# Altium PCB wifi.PcbDoc (part 1 of 2)
Units mm, origin at the board's own origin, x right, y up, seen from the top; angles counter-clockwise.
Board outline 104 x 32.68 mm, 4 copper layers (Top Layer, Int1 (GND), Int2 (PWR), GND), stack 1.369 mm thick; 67 components, 46 nets, 270 pads, 283 vias.
Unrouted connection lines stored in the file: 6.
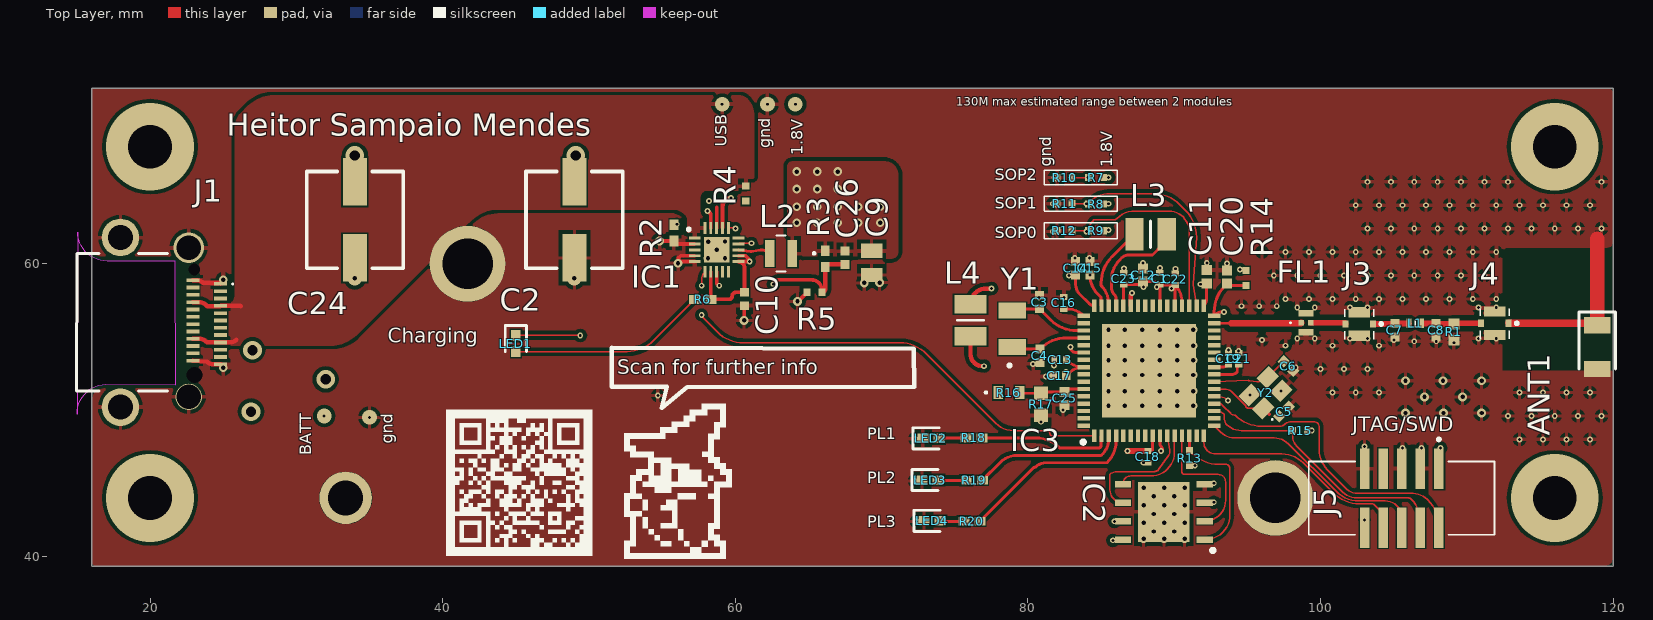
[diagram p0: Top Layer view]
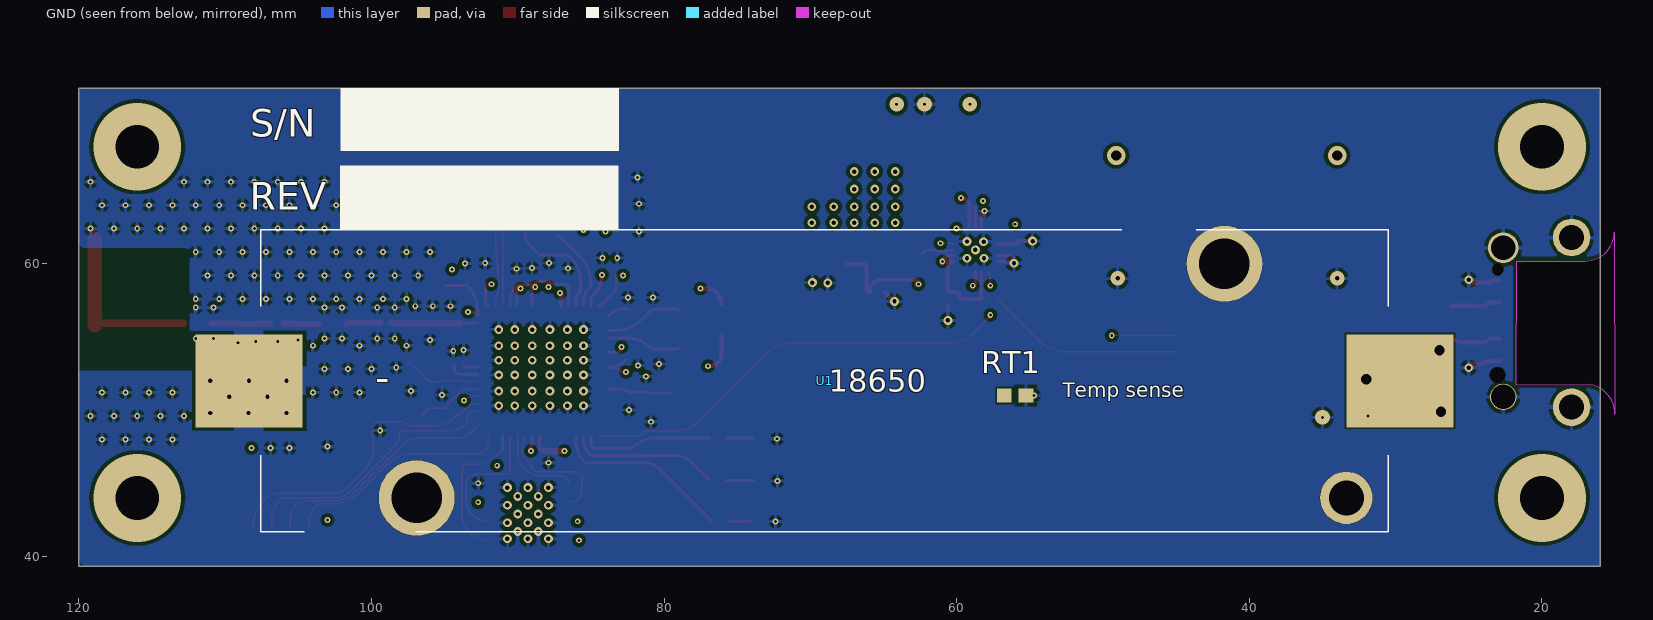
[diagram p1: GND view, seen from below]
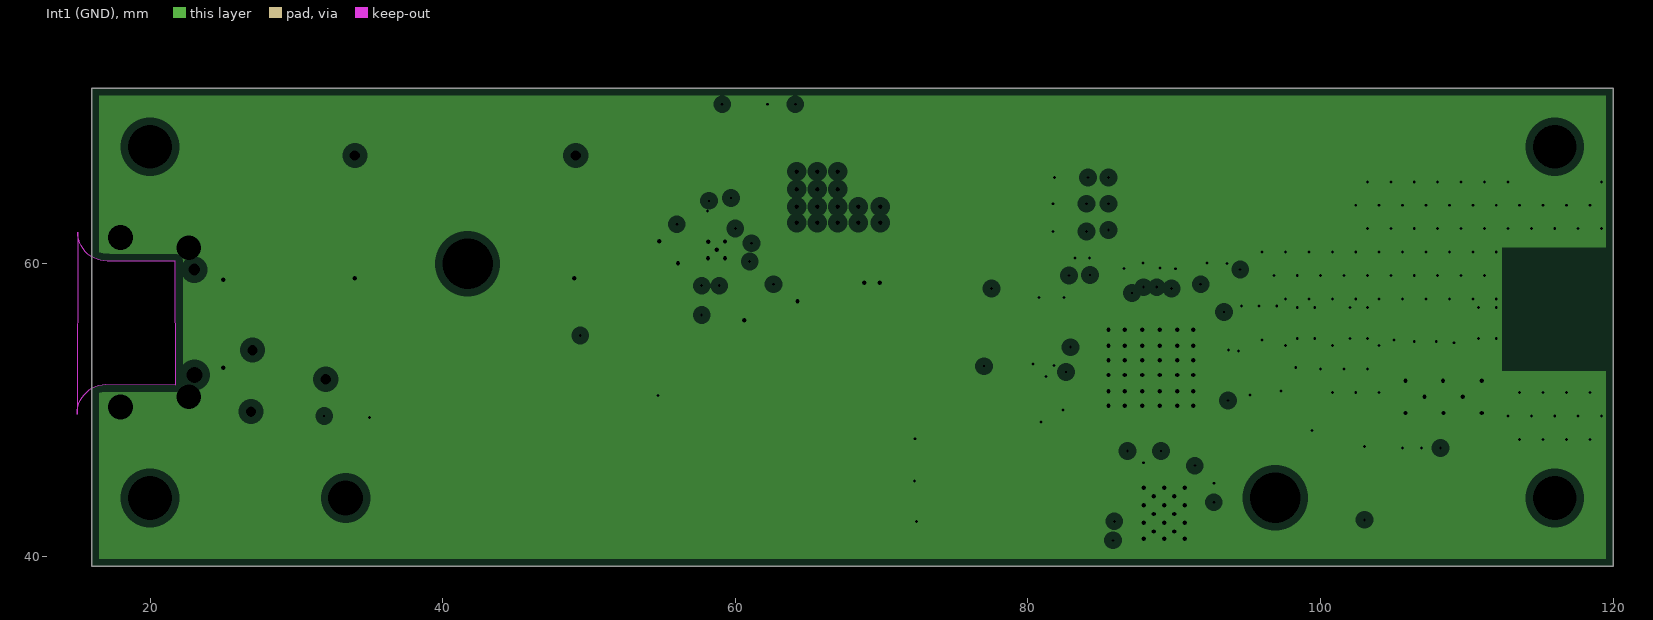
[diagram p2: Int1 (GND), clearances drawn from the general rule]
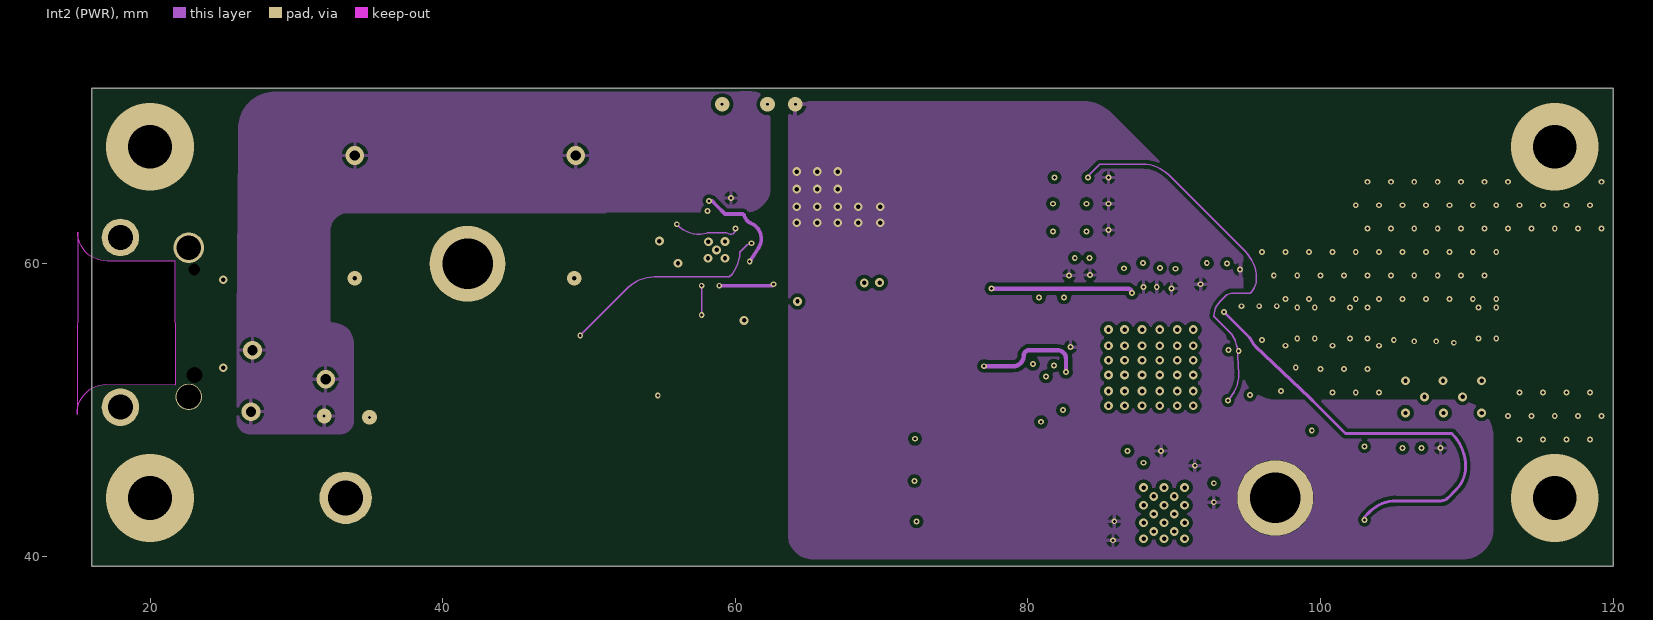
[diagram p3: Int2 (PWR)]
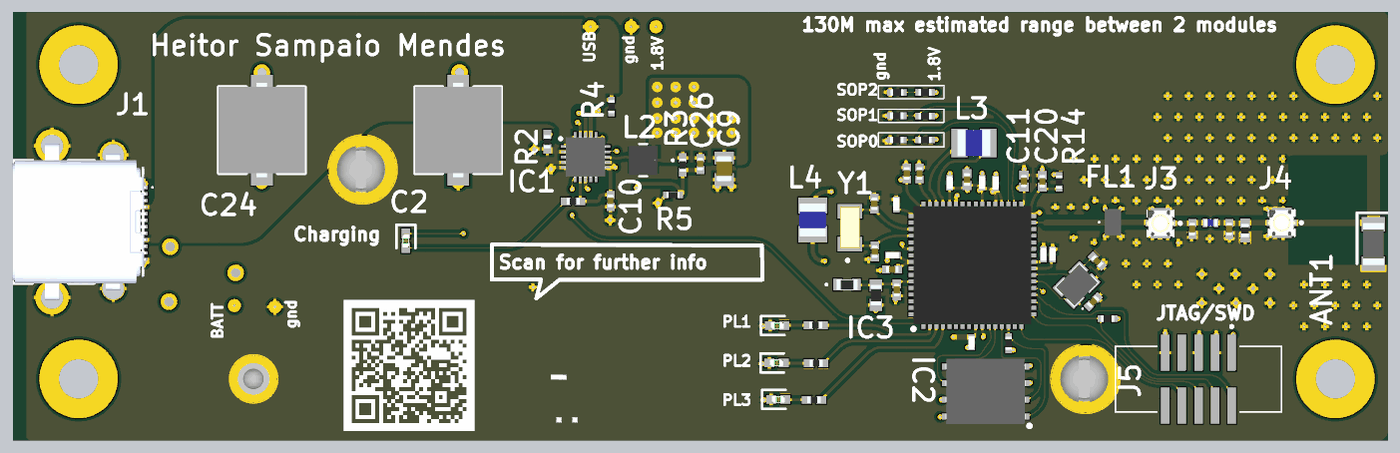
[diagram p4: 3D render of the assembled board from above, using the file's embedded part models]

## Layer stack, top to bottom
Top Solder: solder mask 0.0254, SM-001, Dk 4
Top Layer: signal copper 0.035
Dielectric 1: prepreg 0.1295, PP-017, Dk 4.3
Dielectric 2: prepreg 0.1295, PP-017, Dk 4.3
Int1 (GND): plane copper 0.035, net GND
Dielectric 3: core 0.7112, Core-039, Dk 4.8
Int2 (PWR): signal copper 0.035
Dielectric 4: prepreg 0.1295, PP-017, Dk 4.3
Dielectric 5: prepreg 0.1295, PP-017, Dk 4.3
GND: signal copper 0.035
Bottom Solder: solder mask 0.0254, SM-001, Dk 4

## Board outline
16.01,39.32 16,72 120,72 120,39.32
cut-out: 15.013,49.727 cw(c17.016,49.754) 16.989,51.757 21.74,51.74 21.739,60.172 17.088,60.178 cw(c17.061,62.181) 15.058,62.154

## Design rules (kind name [scope] priority, off if disabled: settings)
Clearance Clearance_1 [WithinRoom('RoomDefinition_2')] p1: gap=0.254 ignorepadtopadclearanceinfootprint=FALSE except(0: Arc-Hole Track-Hole SMDPad-Hole THPad-Hole Via-Hole Fill-Hole Poly-Hole Region-Hole Text-Hole; 0.001: Arc-Arc Arc-Track Arc-SMDPad Arc-THPad Track-Track Track-SMDPad Track-THPad SMDPad-SMDPad SMDPad-THPad SMDPad-Via THPad-THPad THPad-Via THPad-Fill THPad-Poly THPad-Region THPad-Text; 0.1: SMDPad-Fill SMDPad-Poly SMDPad-Region; 0.381: Arc-Fill Arc-Poly Arc-Region Track-Fill Track-Poly Track-Region)
Clearance [All] p2: gap=0.254 ignorepadtopadclearanceinfootprint=FALSE except(0: Arc-Hole Track-Hole SMDPad-Hole THPad-Hole Via-Hole Fill-Hole Poly-Hole Region-Hole Text-Hole; 0.001: Arc-Arc Arc-Track Arc-SMDPad Arc-THPad Track-Track Track-SMDPad Track-THPad SMDPad-SMDPad SMDPad-THPad SMDPad-Via THPad-THPad THPad-Via THPad-Fill THPad-Poly THPad-Region THPad-Text; 0.1: SMDPad-Fill SMDPad-Poly SMDPad-Region)
ComponentClearance [All] p1: gap=0.01 collisioncheckmode=3 verticalgap=0.254 showdistances=FALSE
MatchedLengths MatchLengths_xSignals_IC3_FL1 [InxSignalClass('xSignals_IC3_FL1_MatchLengthsClass')] p1: tolerance=2.54 checknetsindiffpair=FALSE checkdiffpairvsdiffpair=TRUE checkxsignals=TRUE checkothers=TRUE
PlaneClearance [All] p1: clearance=0.508
PlaneConnect [All] p1: planeconnectstyle=Relief reliefexpansion=0.508 reliefentries=4 reliefconductorwidth=0.254 reliefairgap=0.254
PolygonConnect [All] p1: connectstyle=Relief reliefconductorwidth=0.254 reliefentries=4 polygonreliefangle="90 Angle" airgapwidth=0.254
RoomDefinition RoomDefinition_2 [False vs False] p1: confinementstyle=ConfineIn formatcopy=TRUE lockcomponents=FALSE outline 93.4,57.163 112.7,57.163 112.7,54.8 93.4,54.8
RoomDefinition RoomDefinition_1 [False vs False] p2: confinementstyle=ConfineIn formatcopy=TRUE lockcomponents=FALSE outline 93.9,55.6 92.1,55.6 92.1,56.3 93.9,56.3
RoutingVias [All] p1: holewidth=0.2 width=0.4 viastyle="Through Hole" minholewidth=0.005 minwidth=0.01 maxholewidth=1 maxwidth=1.27
SolderMaskExpansion [All] p1: expansion=0.102 istentingtop=FALSE
Width Width_1 [WithinRoom('RoomDefinition_1')] p1: maxlimit=0.152 minlimit=0.152 preferedwidth=0.152
Width [All] p2: maxlimit=2 minlimit=0.01 preferedwidth=0.2 checkconnectedcopper=TRUE
27 further rules are at their usual default settings.

## Classes and differential pairs
component class RF: ANT1 C7 C8 FL1 J3 J4 L1 R1
component class "Power management": C2 C9 C10 C24 C26 IC1 J1 L2 LED1 R2 R3 R4 R5 R6 RT1 U1
component class microcontroller: C1 C3 C4 C5 C6 C11 C12 C13 C14 C15 C16 C17 C18 C19 C20 C21 C22 C23 C25 IC2 IC3 J5 L3 L4 LED2 LED3 LED4 R7 R8 R9 R10 R11 R12 R13 R14 R15 R16 R17 R18 R19 R20 Y1 Y2

## Components (designator, comment, footprint, x,y, rotation, side; value= is the part's Value field where it differs from the comment)
ANT1 "AH316M245001-T" ANTC3216X60N 118.9,54.3 r270 top
C1 "C1005X5R0J475M050BC" C1005_COMMERCIAL 89.01,58.97 r90 top
C2 "UWX1C101MCL1GB" WX(6.3) 49,63 r270 top
C3 "GRM1555C1H100JA01D" CAPC1005X55N 80.788,57.382 r90 top
C4 "GRM1555C1H100JA01D" CAPC1005X55N 80.82,53.72 r270 top
C5 "GRM1555C1H6R2CA01D" CAPC1005X55N 97.5,49.9 r45 top
C6 "GRM1555C1H6R2CA01D" CAPC1005X55N 97.8,53 r315 top
C7 "GRM1555C1HR50BA01D" CAPC1005X55N 105.07,55.45 r270 top
C8 "GRM1555C1HR50BA01D" CAPC1005X55N 107.89,55.45 r270 top
C9 "GRM21BZ70J226ME44L" CAPC2012X145N 69.31,60.056 r270 top
C10 "GRM155C71A225KE11D" CAPC1005X55N 60.63,57.596 r270 top
C11 "GRM158R60J226ME01D" CAPC1005X80N 92.21,59.11 r90 top
C12 "0402YD105KAT4A" CAPC1005X56N 87.86,59.23 r90 top
C13 "C1005X7R1C104K050BC" C1005_COMMERCIAL 82.19,53.44 r180 top
C14 "GRM155C80G106ME44D" CAPC1005X55N 83.26,59.7 r90 top
C15 "GRM155C80G106ME44D" CAPC1005X55N 84.23,59.7 r90 top
C16 "C1005X7R1C104K050BC" C1005_COMMERCIAL 82.45,57.32 r90 top
C17 "GRM155C80G106ME44D" CAPC1005X55N 82.15,52.36 r180 top
C18 "C1005X7R1C104K050BC" C1005_COMMERCIAL 88.2,46.8 r270 top
C19 "C1005X7R1C104K050BC" C1005_COMMERCIAL 93.7,53.5 r90 top
C20 "0402YD105KAT4A" CAPC1005X56N 93.61,59.1 r90 top
C21 "C1005X7R1C104K050BC" C1005_COMMERCIAL 94.4,53.5 r90 top
C22 "C1005X5R0J475M050BC" C1005_COMMERCIAL 90.06,58.94 r90 top
C23 "C1005X5R0J475M050BC" C1005_COMMERCIAL 86.54,58.98 r90 top
C24 "UWX1C101MCL1GB" WX(6.3) 34,63 r270 top
C25 "0402YD105KAT4A" CAPC1005X56N 82.5,50.8 r270 top
C26 "GRM1555C1H100JA01D" CAPC1005X55N 67.49,60.416 r270 top
FL1 "DEA202450BT-1294D1-H" DEA202450BT1294D1H 98.998,55.967 r90 top
IC1 "LTC3553EUD#PBF" QFN40P300X300X80-21N-D 58.72,60.95 r0 top
IC2 "IS25LP032D-JKLE" SON127P600X500X80-9N-D 89.28,43.04 r180 top
IC3 "CC3220SM2ARGKT" QFN50P900X900X100-65N-D 88.272,52.687 r90 top
J1 "2388749-1" 23887491 20,56 r270 top
J3 "MM8030-2610RJ3" MM80302610RJ3 102.64,55.887 r270 top
J4 "MM8030-2610RJ3" MM80302610RJ3 111.9,55.93 r270 top
J5 "3221-10-0300-00" CNC_3221-10-0300-00 105.54,43.98 r180 top
L1 "LQG15HS3N3S02D" LQG15WH0N7B02D 106.47,55.92 r0 top
L2 "EPL2014-472MLB" IND_EPL2014-472MLB_COC 63.126,60.706 r180 top
L3 "CBC2518T100M" INDC2520X100N 88.38,62.02 r0 top
L4 "LQM2HPN2R2MG0L" INDC2520X100N 76.07,56.14 r270 top
LED1 "LT_QH9G-Q2OO-25-2Z4Y" LEDC1005X40N 45,54.55 r270 top
LED2 "LT_QH9G-Q2OO-25-2Z4Y" LEDC1005X40N 73.36,48.07 r0 top
LED3 "LT_QH9G-Q2OO-25-2Z4Y" LEDC1005X40N 73.31,45.22 r0 top
LED4 "LT_QH9G-Q2OO-25-2Z4Y" LEDC1005X40N 73.44,42.43 r0 top
R1 "CH0402-50RGFPT" RESC1006X63N 109.1,55.34 r90 top
R2 "CR0402-FX-3001GLF" RESC1005X40N 55.8,62.116 r270 top
R3 "CPF0402B130KE" RESC1005X35N 66.15,60.336 r90 top
R4 "ERJ-2RKF1003X" ERJ2R_(0402) 60.71,64.796 r270 top
R5 "ERA-2AEB104X" ERA2AED122X 65.412,58.056 r180 top
R6 "CR0402-FX-6200GLF" RESC1005X40N 57.77,57.566 r180 top
R7 "ERJ-2RKF1003X" ERJ2R_(0402) 84.66,65.89 r180 top
R8 "ERJ-2RKF1003X" ERJ2R_(0402) 84.661,64.08 r180 top
R9 "ERJ-2RKF1003X" ERJ2R_(0402) 84.66,62.26 r180 top
R10 "ERJ-2RKF1003X" ERJ2R_(0402) 82.509,65.885 r180 top
R11 "ERJ-2RKF1003X" ERJ2R_(0402) 82.498,64.1 r180 top
R12 "ERJ-2RKF1003X" ERJ2R_(0402) 82.495,62.26 r180 top
R13 "ERJ-2RKF1003X" ERJ2R_(0402) 91.04,46.717 r90 top
R14 "ERJ-2RKF1003X" ERJ2R_(0402) 94.9,59.04 r270 top
R15 "ERJ-2RKF1003X" ERJ2R_(0402) 98.6,48.6 r180 top
R16 "ERA-3VEB3002V" ERA3KV_(0603) 78.7,51.2 r0 top
R17 "RT0603BRD0750KL" RESC1608X55N 80.9,50.4 r270 top
R18 "CR0402-FX-6200GLF" RESC1005X40N 76.3,48.1 r180 top
R19 "CR0402-FX-6200GLF" RESC1005X40N 76.33,45.2 r180 top
R20 "CR0402-FX-6200GLF" RESC1005X40N 76.17,42.4 r180 top
RT1 "NCU18WF104D60RB" THRMC1608X95N 56,51 r0 bottom
U1 "1042P" 1042P 69.03,52 r180 bottom
Y1 "ABS07-32.768KHZ-9-T" ABS-07 78.918,55.548 r90 top
Y2 "ECS-400-8-36B-7KY-TR" ECS400836B7KYTR 96.233,51.173 r45 top

## Footprints (in the part's own frame and the unit in brackets; to place one, negate y for a bottom-side part, rotate by r counter-clockwise, add the part's x,y. Pads: shape width x height; smd on the part's side, far side on the other; paste and mask are expansions set on the pad)
1042P [mm]
  round 5.175 hole 3.45: 1(-27.87,-8) 2(27.33,8)
  round 3.585 hole 2.39: 3(35.66,-8)
  rect 7.34x6.35 smd: 4(-39.33,0) 5(39.33,0)
  silkscreen extent -38.53,-10.33 38.53,10.33, body extent -43.19,-10.33 42.87,10.33, height 15.6
23887491 [mm]
  rect 0.254x0.9 smd: A1(-2.625,4.825) A2(-2.125,4.825) A3(-1.625,4.825) A4(-1.125,4.825) A5(-0.625,4.825) A6(-0.125,4.825) A7(0.375,4.825) A8(0.875,4.825) A9(1.375,4.825) A10(1.875,4.825) A11(2.375,4.825) A12(2.875,4.825) B1(-2.875,2.925) B2(-2.375,2.925) B3(-1.875,2.925) B4(-1.375,2.925) B5(-0.875,2.925) B6(-0.375,2.925) B7(0.125,2.925) B8(0.625,2.925) B9(1.125,2.925) B10(1.625,2.925) B11(2.125,2.925) B12(2.625,2.925)
  round 2.1 hole 1.68: MH1(-5.1,2.645)
  round 1.8 hole 1.68: MH2(5.1,2.645)
  round 2.565 hole 1.71: MH3(-5.8,-2.025) MH4(5.8,-2.025)
  round 0.405 hole 0.81 unplated: MH5(-3.6,3.025)
  round 0.55 hole 1.1 unplated: MH6(3.6,3.025)
  silkscreen extent -4.7,-5.02 4.7,5.7, body extent -5.95,-5.03 5.95,5.11, height 2.89
ABS-07 [mm]
  rect 1.1x1.9 smd: 1(-1.25,0) 2(1.25,0)
  silkscreen extent -2.58,0.09 -2.41,0.26, body extent -1.6,-0.75 1.6,0.75, height 0.9
ANTC3216X60N [mm]
  rect 1.1x1.8 smd: 1(-1.5,0) 2(1.5,0)
  silkscreen extent -2.4,-1.25 1.5,1.25, body extent -1.6,-0.8 1.6,0.8, height 0.6
C1005_COMMERCIAL [mm]
  rect 0.4x0.5 smd: 1(-0.4,0) 2(0.4,0)
  body extent -0.47,-0.25 0.53,0.25, height 0.51
CAPC1005X55N [mm]
  rect 0.6x0.62 smd: 1(-0.46,0) 2(0.46,0)
  body extent -0.5,-0.25 0.5,0.25, height 0.55
CAPC1005X56N [mm]
  rect 0.68x0.68 smd: 1(-0.45,0) 2(0.45,0)
  body extent -0.5,-0.25 0.5,0.25, height 0.56
CAPC1005X80N [mm]
  rect 0.69x0.72 smd: 1(-0.46,0) 2(0.46,0)
  body extent -0.5,-0.25 0.5,0.25, height 0.8
CAPC2012X145N [mm]
  rect 0.97x1.47 smd: 1(-0.83,0) 2(0.83,0)
  body extent -1,-0.63 1,0.63, height 1.45
CNC_3221-10-0300-00 [mm]
  rect 0.65x2.76 smd: 1(-2.54,-2.02) 2(-2.54,2.02) 3(-1.27,-2.02) 4(-1.27,2.02) 5(0,-2.02) 6(0,2.02) 7(1.27,-2.02) 8(1.27,2.02) 9(2.54,-2.02) 10(2.54,2.02)
  silkscreen extent -6.35,-4.12 6.35,2.5
DEA202450BT1294D1H [mm]
  rect 0.35x0.35 smd: 1(0,0.325) 3(0,-0.325)
  rect 0.45x1 smd: 2(0.65,0) 4(-0.65,0)
  silkscreen extent -0.05,1 0.05,1.1, body extent -1,-0.63 1,0.63, height 0.9
ECS400836B7KYTR [mm]
  rect 1.2x1 smd: 1(-0.85,-0.65) 2(0.85,-0.65) 3(0.85,0.65) 4(-0.85,0.65)
  silkscreen extent -1,-1.65 -0.9,-1.55, body extent -1.35,-1.05 1.35,1.05, height 0.7
ERA2AED122X [mm]
  rect 0.475x0.5 smd: 1(-0.512,0) 2(0.512,0)
  body extent -0.5,-0.25 0.5,0.25, height 0.35
ERA3KV_(0603) [mm]
  rect 0.65x0.9 smd: 1(-0.725,0) 2(0.725,0)
  silkscreen extent -1.62,-0.05 -1.53,0.05, body extent -0.8,-0.4 0.8,0.4, height 0.46
ERJ2R_(0402) [mm]
  rect 0.475x0.5 smd: 1(-0.513,0) 2(0.513,0)
  body extent -0.5,-0.25 0.5,0.25, height 0.35
IND_EPL2014-472MLB_COC [mil]
  rect 26x73 smd paste+0 mask+0: 1(-30.5,0) 2(30.5,0)
  silkscreen extent -92,-48 12,48, body extent -44,-44 44,44, height 57
INDC2520X100N [mm]
  rect 1.25x2.2 smd: 1(-1.1,0) 2(1.1,0)
  silkscreen extent 0,-0.9 0,0.9, body extent -1.25,-1 1.25,1, height 1
LEDC1005X40N [mm]
  rect 0.75x0.65 smd: 1(-0.55,0) 2(0.55,0)
  silkscreen extent -1.22,-0.72 0.55,0.72, body extent -0.5,-0.25 0.5,0.25, height 0.16
LQG15WH0N7B02D [mm]
  rect 0.35x0.65 smd: 1(-0.425,0) 2(0.425,0)
  silkscreen extent 0,-0.25 0,0.25, body extent -0.5,-0.25 0.5,0.25, height 0.55
MM80302610RJ3 [mm]
  rect 0.5x0.4 smd: 1(0,0.95) 2(0,-0.95)
  rect 0.7x1.5 smd: 3(-0.8,0) 4(0.8,0)
  silkscreen extent -1,-1 1.05,1.6, body extent -1,-1.05 1,1.05, height 0.91
QFN40P300X300X80-21N-D [mm]
  rect 0.8x0.2 smd: 1(-1.5,0.8) 2(-1.5,0.4) 3(-1.5,0) 4(-1.5,-0.4) 5(-1.5,-0.8) 11(1.5,-0.8) 12(1.5,-0.4) 13(1.5,0) 14(1.5,0.4) 15(1.5,0.8)
  rect 0.2x0.8 smd: 6(-0.8,-1.5) 7(-0.4,-1.5) 8(0,-1.5) 9(0.4,-1.5) 10(0.8,-1.5) 16(0.8,1.5) 17(0.4,1.5) 18(0,1.5) 19(-0.4,1.5) 20(-0.8,1.5)
  rect 1.75x1.75 smd: 21(0,0)
  silkscreen extent -2,1.3 -1.8,1.5, body extent -1.55,-1.55 1.55,1.55, height 0.8
QFN50P900X900X100-65N-D [mm]
  rect 0.85x0.3 smd: 1(-4.45,3.75) 2(-4.45,3.25) 3(-4.45,2.75) 4(-4.45,2.25) 5(-4.45,1.75) 6(-4.45,1.25) 7(-4.45,0.75) 8(-4.45,0.25) 9(-4.45,-0.25) 10(-4.45,-0.75) 11(-4.45,-1.25) 12(-4.45,-1.75) 13(-4.45,-2.25) 14(-4.45,-2.75) 15(-4.45,-3.25) 16(-4.45,-3.75) 33(4.45,-3.75) 34(4.45,-3.25) 35(4.45,-2.75) 36(4.45,-2.25) 37(4.45,-1.75) 38(4.45,-1.25) 39(4.45,-0.75) 40(4.45,-0.25) 41(4.45,0.25) 42(4.45,0.75) 43(4.45,1.25) 44(4.45,1.75) 45(4.45,2.25) 46(4.45,2.75) 47(4.45,3.25) 48(4.45,3.75)
  rect 0.3x0.85 smd: 17(-3.75,-4.45) 18(-3.25,-4.45) 19(-2.75,-4.45) 20(-2.25,-4.45) 21(-1.75,-4.45) 22(-1.25,-4.45) 23(-0.75,-4.45) 24(-0.25,-4.45) 25(0.25,-4.45) 26(0.75,-4.45) 27(1.25,-4.45) 28(1.75,-4.45) 29(2.25,-4.45) 30(2.75,-4.45) 31(3.25,-4.45) 32(3.75,-4.45) 49(3.75,4.45) 50(3.25,4.45) 51(2.75,4.45) 52(2.25,4.45) 53(1.75,4.45) 54(1.25,4.45) 55(0.75,4.45) 56(0.25,4.45) 57(-0.25,4.45) 58(-0.75,4.45) 59(-1.25,4.45) 60(-1.75,4.45) 61(-2.25,4.45) 62(-2.75,4.45) 63(-3.25,4.45) 64(-3.75,4.45)
  rect 6.4x6.4 smd: 65(0,0)
  silkscreen extent -5,4.38 -4.75,4.62, body extent -4.5,-4.5 4.5,4.5, height 1
RESC1005X35N [mm]
  rect 0.7x0.6 smd: 1(-0.55,0) 2(0.55,0)
  body extent -0.5,-0.25 0.5,0.25, height 0.35
RESC1005X40N [mm]
  rect 0.75x0.6 smd: 1(-0.55,0) 2(0.55,0)
  body extent -0.5,-0.25 0.5,0.25, height 0.4
RESC1006X63N [mm]
  rect 0.75x0.75 smd: 1(-0.55,0) 2(0.55,0)
  body extent -0.5,-0.3 0.5,0.3, height 0.63
RESC1608X55N [mm]
  rect 0.9x0.95 smd: 1(-0.75,0) 2(0.75,0)
  body extent -0.77,-0.4 0.77,0.4, height 0.55
SON127P600X500X80-9N-D [mm]
  rect 1.1x0.45 smd: 1(-2.8,1.905) 2(-2.8,0.635) 3(-2.8,-0.635) 4(-2.8,-1.905) 5(2.8,-1.905) 6(2.8,-0.635) 7(2.8,0.635) 8(2.8,1.905)
  rect 3.5x4.1 smd: 9(0,0)
  silkscreen extent -3.48,2.51 -3.23,2.75, body extent -3.05,-2.5 3.05,2.5, height 0.8
THRMC1608X95N [mm]
  rect 1x0.97 smd: 1(-0.735,0) 2(0.735,0)
  body extent -0.8,-0.4 0.8,0.4, height 0.95
WX(6.3) [mm]
  rect 3.25x1.65 smd: 1(-2.6,0) 2(2.6,0)
  silkscreen extent -3.3,-3.3 3.3,3.3, body extent -3.6,-3.3 3.6,3.3, height 5.5

## Part data
ANT1: "Antenna", Manufacturer_Name="TAIYO YUDEN", Mouser Part Number=963-AH316M245001-T, Datasheet Link=http://www.mouser.com/ds/2/396/chipantenna01_e-587795.pdf, Height=0.6mm, Manufacturer_Part_Number=AH316M245001-T, Mouser Price/Stock=https://www.mouser.co.uk/ProductDetail/Taiyo-Yuden/AH316M245001-T?qs=I6KAKw0tg2zXv3bNBw9dFQ%3D%3D
C1 C22 C23: "Capacitor", Manufacturer_Name=TDK, Mouser Part Number=810-C1005X5R0J475M, Arrow Part Number=C1005X5R0J475M050BC, Arrow Price/Stock=https://www.arrow.com/en/products/c1005x5r0j475m050bc/tdk, Datasheet Link=https://product.tdk.com/system/files/dam/doc/product/capacitor/ceramic/mlcc/catalog/mlcc_commercial_general_en.pdf, Height=0.55mm, Manufacturer_Part_Number=C1005X5R0J475M050BC, Mouser Price/Stock=https://www.mouser.co.uk/ProductDetail/TDK/C1005X5R0J475M050BC?qs=NRhsANhppD%2Fq1XiyABABNQ%3D%3D
C2 C24: "Capacitor", Manufacturer_Name=Nichicon, Mouser Part Number=647-UWX1C101MCL1, Arrow Part Number=UWX1C101MCL1GB, Arrow Price/Stock=https://www.arrow.com/en/products/uwx1c101mcl1gb/nichicon?region=nac, Datasheet Link=https://componentsearchengine.com/Datasheets/2/UWX1C101MCL1GB.pdf, Manufacturer_Part_Number=UWX1C101MCL1GB, Mouser Price/Stock=https://www.mouser.co.uk/ProductDetail/Nichicon/UWX1C101MCL1GB?qs=7D1LtPJG0i2nFwCSiru1OQ%3D%3D
C3 C4 C26: "Capacitor", Manufacturer_Name="Murata Electronics", Mouser Part Number=81-GRM1555C1H100JA1D, Arrow Part Number=GRM1555C1H100JA01D, Arrow Price/Stock=https://www.arrow.com/en/products/grm1555c1h100ja01d/murata-manufacturing, Datasheet Link=https://datasheet.datasheetarchive.com/originals/distributors/Datasheets_SAMA/ec4f1577dddcc7a13ddad897a28002d3.pdf, Height=0.55mm, Manufacturer_Part_Number=GRM1555C1H100JA01D, Mouser Price/Stock=https://www.mouser.co.uk/ProductDetail/Murata-Electronics/GRM1555C1H100JA01D?qs=to8XolpOzrNUIL4CZ%252BkORA%3D%3D
C5 C6: "Capacitor", Manufacturer_Name="Murata Electronics", Mouser Part Number=81-GRM1555C1H6R2CA1D, Arrow Part Number=GRM1555C1H6R2CA01D, Arrow Price/Stock=https://www.arrow.com/en/products/grm1555c1h6r2ca01d/murata-manufacturing?region=nac, Datasheet Link=https://datasheet.datasheetarchive.com/originals/distributors/Datasheets_SAMA/ec4f1577dddcc7a13ddad897a28002d3.pdf, Height=0.55mm, Manufacturer_Part_Number=GRM1555C1H6R2CA01D, Mouser Price/Stock=https://www.mouser.co.uk/ProductDetail/Murata-Electronics/GRM1555C1H6R2CA01D?qs=e%252BE4OD6MgMdxw4b5lMPkpQ%3D%3D
C7 C8: "Capacitor", Manufacturer_Name="Murata Electronics", Mouser Part Number=81-GRM1555C1HR50BA1D, Arrow Part Number=GRM1555C1HR50BA01D, Arrow Price/Stock=https://www.arrow.com/en/products/grm1555c1hr50ba01d/murata-manufacturing, Datasheet Link=https://datasheet.datasheetarchive.com/originals/distributors/Datasheets_SAMA/ec4f1577dddcc7a13ddad897a28002d3.pdf, Height=0.55mm, Manufacturer_Part_Number=GRM1555C1HR50BA01D, Mouser Price/Stock=https://www.mouser.co.uk/ProductDetail/Murata-Electronics/GRM1555C1HR50BA01D?qs=e%252BE4OD6MgMeKFfJD3AEN3Q%3D%3D
C9: "Capacitor", Manufacturer_Name="Murata Electronics", Mouser Part Number=81-GRM21BZ70J226ME4L, Arrow Part Number=GRM21BZ70J226ME44L, Arrow Price/Stock=https://www.arrow.com/en/products/grm21bz70j226me44l/murata-manufacturing?region=nac, Datasheet Link=https://datasheet.datasheetarchive.com/originals/distributors/Datasheets_SAMA/f9f842f388215b641c6ec7ec92c93a8d.pdf, Height=1.45mm, Manufacturer_Part_Number=GRM21BZ70J226ME44L, Mouser Price/Stock=https://www.mouser.co.uk/ProductDetail/Murata-Electronics/GRM21BZ70J226ME44L?qs=gt1LBUVyoHk1niSPiXLfGQ%3D%3D
C10: "Capacitor", Manufacturer_Name="Murata Electronics", Mouser Part Number=81-GRM155C71A225KE1D, Arrow Part Number=GRM155C71A225KE11D, Arrow Price/Stock=https://www.arrow.com/en/products/grm155c71a225ke11d/murata-manufacturing?region=nac, Datasheet Link=https://psearch.en.murata.com/capacitor/product/GRM155C71A225KE11%23.html, Height=0.55mm, Manufacturer_Part_Number=GRM155C71A225KE11D, Mouser Price/Stock=https://www.mouser.co.uk/ProductDetail/Murata-Electronics/GRM155C71A225KE11D?qs=hNud%2FORuBR1WTMd%2FnRwa3Q%3D%3D
C11: "Capacitor", Manufacturer_Name="Murata Electronics", Mouser Part Number=81-GRM158R60J226ME1D, Arrow Part Number=GRM158R60J226ME01D, Arrow Price/Stock=https://www.arrow.com/en/products/grm158r60j226me01d/murata-manufacturing?region=europe, Datasheet Link=https://search.murata.co.jp/Ceramy/image/img/A01X/G101/ENG/GRM158R60J226ME01-01A.pdf, Height=0.8mm, Manufacturer_Part_Number=GRM158R60J226ME01D, Mouser Price/Stock=https://www.mouser.co.uk/ProductDetail/Murata-Electronics/GRM158R60J226ME01D?qs=hd1VzrDQEGhRlVgN8RQ1oA%3D%3D
C12 C20 C25: "Capacitor", Manufacturer_Name=AVX, Mouser Part Number=581-0402YD105KAT4A, Datasheet Link=https://datasheet.datasheetarchive.com/originals/dk/DKDS40/DSANUWW008853.pdf, Height=0.56mm, Manufacturer_Part_Number=0402YD105KAT4A, Mouser Price/Stock=https://www.mouser.co.uk/ProductDetail/AVX/0402YD105KAT4A?qs=mQP6vorrPAd40YYIeuHDNw%3D%3D
C13 C16 C18 C19 C21: "Capacitor", Manufacturer_Name=TDK, Mouser Part Number=810-C1005X7R1C104K, Arrow Part Number=C1005X7R1C104K050BC, Arrow Price/Stock=https://www.arrow.com/en/products/c1005x7r1c104k050bc/tdk?region=nac, Datasheet Link=https://product.tdk.com/system/files/dam/doc/product/capacitor/ceramic/mlcc/catalog/mlcc_commercial_general_en.pdf, Height=0.55mm, Manufacturer_Part_Number=C1005X7R1C104K050BC, Mouser Price/Stock=https://www.mouser.co.uk/ProductDetail/TDK/C1005X7R1C104K050BC?qs=NRhsANhppD%252BhAGOapA8QKQ%3D%3D
C14 C15 C17: "Capacitor", Manufacturer_Name="Murata Electronics", Mouser Part Number=81-GRM155C80G106ME44, Height=0.55mm, Manufacturer_Part_Number=GRM155C80G106ME44D, Mouser Price/Stock=https://www.mouser.co.uk/ProductDetail/Murata-Electronics/GRM155C80G106ME44D?qs=T3oQrply3y9851rB85WA8A%3D%3D
FL1: "Filter", Manufacturer_Name=TDK, Mouser Part Number=810-DEA202450BT1294D, Datasheet Link=https://www.mouser.com/catalog/specsheets/TDK_DEA202450BT_1294D1_H_ver1_0.pdf, Height=0.8mm, Manufacturer_Part_Number=DEA202450BT-1294D1-H, Mouser Price/Stock=https://www.mouser.co.uk/ProductDetail/TDK/DEA202450BT-1294D1-H?qs=W%2FMpXkg%252BdQ4stfqD0qqbsg%3D%3D
IC1: "Integrated Circuit", Manufacturer_Name="Analog Devices", Mouser Part Number=584-LTC3553EUD#PBF, Arrow Part Number=LTC3553EUD#PBF, Arrow Price/Stock=https://www.arrow.com/en/products/ltc3553eudpbf/analog-devices, Datasheet Link=https://www.mouser.com/datasheet/2/609/3553fc-1270248.pdf, Height=0.8mm, Manufacturer_Part_Number=LTC3553EUD#PBF, Mouser Price/Stock=https://www.mouser.co.uk/ProductDetail/Analog-Devices/LTC3553EUDPBF?qs=hVkxg5c3xu%252Bt8tpGZUg1fw%3D%3D
IC2: "Integrated Circuit", Manufacturer_Name="Integrated Silicon Solution Inc.", Mouser Part Number=870-IS25LP032D-JKLE, Arrow Part Number=IS25LP032D-JKLE, Arrow Price/Stock=https://www.arrow.com/en/products/is25lp032d-jkle/integrated-silicon-solution-inc?region=nac, Datasheet Link=https://www.arrow.com/en/products/is25lp032d-jkle/integrated-silicon-solution-inc?region=nac, Height=0.8mm, Manufacturer_Part_Number=IS25LP032D-JKLE, Mouser Price/Stock=https://www.mouser.co.uk/ProductDetail/ISSI/IS25LP032D-JKLE?qs=DXv0QSHKF4y5hGfg2Mzxpw%3D%3D
IC3: "Integrated Circuit", Manufacturer_Name="Texas Instruments", Mouser Part Number=595-CC3220SM2ARGKT, Arrow Part Number=CC3220SM2ARGKT, Arrow Price/Stock=https://www.arrow.com/en/products/cc3220sm2argkt/texas-instruments, Datasheet Link=https://www.ti.com/lit/gpn/CC3220S, Height=1mm, Manufacturer_Part_Number=CC3220SM2ARGKT, Mouser Price/Stock=https://www.mouser.co.uk/ProductDetail/Texas-Instruments/CC3220SM2ARGKT/?qs=Mv7BduZupUjdsZg3%2FQIrGA%3D%3D
J1: "Connector", Manufacturer_Name="TE Connectivity", Mouser Part Number=571-2388749-1, Arrow Part Number=2388749-1, Arrow Price/Stock=https://www.arrow.com/en/products/2388749-1/te-connectivity?region=europe, Datasheet Link=https://www.mouser.de/datasheet/2/418/8/ENG_CD_2388749_1-2492255.pdf, Height=3.29mm, Manufacturer_Part_Number=2388749-1, Mouser Price/Stock=https://www.mouser.co.uk/ProductDetail/TE-Connectivity/2388749-1?qs=aP1CjGhiNiHDGRk0QZ2ZCg%3D%3D
J3 J4: "Connector", Manufacturer_Name="Murata Electronics", Mouser2 Part Number=81-MM8030-2610RJ3, Datasheet Link=https://componentsearchengine.com//MM8030-2610RJ3.pdf, Height=1mm, Manufacturer_Part_Number=MM8030-2610RJ3, Mouser2 Price/Stock=https://www.mouser.com/Search/Refine.aspx?Keyword=81-MM8030-2610RJ3
J5: "Connector Header Surface Mount 10 position 0.050 (1.27mm)", Package=None, Availability="In Stock", Check_prices=https://www.snapeda.com/parts/3221-10-0300-00/CNC+Tech/view-part/?ref=eda, MF="CNC Tech", MP=3221-10-0300-00, Price=None, Purchase-URL=https://pricing.snapeda.com/search/part/3221-10-0300-00/?ref=eda, SnapEDA_Link=https://www.snapeda.com/parts/3221-10-0300-00/CNC+Tech/view-part/?ref=snap
L1: "Inductor", Manufacturer_Name="Murata Electronics", Mouser Part Number=81-LQG15HS3N3S02D, Arrow Part Number=LQG15HS3N3S02D, Arrow Price/Stock=https://www.arrow.com/en/products/lqg15hs3n3s02d/murata-manufacturing?region=nac, Datasheet Link=https://psearch.en.murata.com/inductor/product/LQG15HS3N3S02%23.html, Height=0.55mm, Manufacturer_Part_Number=LQG15HS3N3S02D, Mouser Price/Stock=https://www.mouser.co.uk/ProductDetail/Murata-Electronics/LQG15HS3N3S02D?qs=ctz47l0uL1AsjFUyMRD%2FGA%3D%3D
L2: "No Description Available", Mfr_Name=Coilcraft, Copyright="Copyright (C) 2022 Ultra Librarian. All rights reserved.", Manufacturer_Part_Number=EPL2014-472MLB, RefDes=RefDes, Type=DEV
L3: "Inductor", Manufacturer_Name="TAIYO YUDEN", Mouser Part Number=963-CBC2518T100M, Arrow Part Number=CBC2518T100M, Arrow Price/Stock=https://www.arrow.com/en/products/cbc2518t100m/taiyo-yuden, Datasheet Link=https://componentsearchengine.com/Datasheets/2/CBC2518T100M.pdf, Height=1.8mm, Manufacturer_Part_Number=CBC2518T100M, Mouser Price/Stock=https://www.mouser.co.uk/ProductDetail/Taiyo-Yuden/CBC2518T100M?qs=I6KAKw0tg2xfOZzcznL4uQ%3D%3D
L4: "Inductor", Manufacturer_Name="Murata Electronics", Mouser Part Number=81-LQM2HPN2R2MG0L, Arrow Part Number=LQM2HPN2R2MG0L, Arrow Price/Stock=https://www.arrow.com/en/products/lqm2hpn2r2mg0l/murata-manufacturing, Datasheet Link=https://search.murata.co.jp/Ceramy/image/img/P02/JELF243B-0019.pdf, Height=1mm, Manufacturer_Part_Number=LQM2HPN2R2MG0L, Mouser Price/Stock=https://www.mouser.co.uk/ProductDetail/Murata-Electronics/LQM2HPN2R2MG0L?qs=%2F%252BYoplLUB5jZYKbM2SoJpQ%3D%3D
LED1 LED2 LED3 LED4: "LED", Arrow Part Number="LT QH9G-Q2OO-25-2Z4Y", Manufacturer_Name=OSRAM, Mouser Part Number=720-LTQH9GQ2S225, Arrow Price/Stock=https://www.arrow.com/en/products/ltqh9g-q2oo-25-2z4y/osram-opto-semiconductors, Datasheet Link=https://dammedia.osram.info/media/resource/hires/osram-dam-5171475/LT%20QH9G_EN.pdf, Height=0.4mm, Manufacturer_Part_Number="LT QH9G-Q2OO-25-2Z4Y", Mouser Price/Stock=https://www.mouser.co.uk/ProductDetail/OSRAM-Opto-Semiconductors/LT-QH9G-Q2OO-25-2Z4Y?qs=74fRo9GAWsyBNNbbi2bfww%3D%3D
R1: "Resistor", Manufacturer_Name=Vishay, Mouser Part Number=71-CH0402-50RGFPT, Arrow Part Number=CH0402-50RGFPT, Arrow Price/Stock=https://www.arrow.com/en/products/ch0402-50rgfpt/vishay, Datasheet Link=http://www.vishay.com/docs/53014/ch.pdf, Height=0.627mm, Manufacturer_Part_Number=CH0402-50RGFPT, Mouser Price/Stock=https://www.mouser.co.uk/ProductDetail/Vishay-Sfernice/CH0402-50RGFPT?qs=zR8VgEwoOb306akMd%2FOkng%3D%3D
R2: "Resistor", Manufacturer_Name=Bourns, Mouser Part Number=652-CR0402FX-3001GLF, Datasheet Link=https://www.bourns.com/pdfs/CR0402.pdf, Height=0.4mm, Manufacturer_Part_Number=CR0402-FX-3001GLF, Mouser Price/Stock=https://www.mouser.co.uk/ProductDetail/Bourns/CR0402-FX-3001GLF?qs=SFHnMgm9IsyiPGXk%2Fs2PYg%3D%3D
R3: "Resistor", Manufacturer_Name="TE Connectivity", Mouser Part Number=279-CPF0402B130KE, Datasheet Link=http://www.farnell.com/datasheets/1786775.pdf, Height=0.35mm, Manufacturer_Part_Number=CPF0402B130KE, Mouser Price/Stock=https://www.mouser.com/Search/Refine.aspx?Keyword=279-CPF0402B130KE
R4 R7 R8 R9 R10 R11 R12 R13 R14 R15: "Resistor", Manufacturer_Name=Panasonic, Mouser Part Number=667-ERJ-2RKF1003X, Arrow Part Number=ERJ-2RKF1003X, Arrow Price/Stock=https://www.arrow.com/en/products/erj-2rkf1003x/panasonic?region=nac, Datasheet Link=http://industrial.panasonic.com/cdbs/www-data/pdf/RDA0000/AOA0000C304.pdf, Height=0.4mm, Manufacturer_Part_Number=ERJ-2RKF1003X, Mouser Price/Stock=https://www.mouser.co.uk/ProductDetail/Panasonic/ERJ-2RKF1003X?qs=H7k1u0Mp9JQnXoBKdf15Qg%3D%3D
R5: "Resistor", Manufacturer_Name=Panasonic, Mouser Part Number=667-ERA-2AEB104X, Arrow Part Number=ERA-2AEB104X, Arrow Price/Stock=https://www.arrow.com/en/products/era-2aeb104x/panasonic, Datasheet Link=http://industrial.panasonic.com/cdbs/www-data/pdf/RDM0000/AOA0000C307.pdf, Height=0.4mm, Manufacturer_Part_Number=ERA-2AEB104X, Mouser Price/Stock=https://www.mouser.co.uk/ProductDetail/Panasonic/ERA-2AEB104X?qs=YFwoyZoVY0jijibKYIWHHg%3D%3D
R6 R18 R19 R20: "Resistor", Manufacturer_Name=Bourns, Mouser Part Number=652-CR0402FX-6200GLF, Arrow Part Number=CR0402-FX-6200GLF, Arrow Price/Stock=https://www.arrow.com/en/products/cr0402-fx-6200glf/bourns?region=nac, Datasheet Link=https://www.bourns.com/pdfs/CR0402.pdf, Height=0.4mm, Manufacturer_Part_Number=CR0402-FX-6200GLF, Mouser Price/Stock=https://www.mouser.co.uk/ProductDetail/Bourns/CR0402-FX-6200GLF?qs=ePR1ZvdkOKK%252BzBZSL76wNw%3D%3D
R16: "Resistor", Manufacturer_Name=Panasonic, Mouser Part Number=667-ERA-3VEB3002V, Datasheet Link=http://industrial.panasonic.com/cdbs/www-data/pdf/RDM0000/RDM0000C331.pdf, Height=0.4mm, Manufacturer_Part_Number=ERA-3VEB3002V, Mouser Price/Stock=https://www.mouser.co.uk/ProductDetail/Panasonic/ERA-3VEB3002V?qs=OlC7AqGiEDlbfxcRQEdT8g%3D%3D
R17: "Resistor", Manufacturer_Name=KEMET, Mouser Part Number=603-RT0603BRD0750KL, Arrow Part Number=RT0603BRD0750KL, Arrow Price/Stock=https://www.arrow.com/en/products/rt0603brd0750kl/yageo, Datasheet Link=https://mouser.componentsearchengine.com/Datasheets/1/RT0603BRD0750KL.pdf, Height=0.55mm, Manufacturer_Part_Number=RT0603BRD0750KL, Mouser Price/Stock=https://www.mouser.co.uk/ProductDetail/YAGEO/RT0603BRD0750KL?qs=qpJ%252B%252B%252Bdg6p2%2FJCmrad8NSA%3D%3D
RT1: "NTC Thermistor 100k 0603 (1608 Metric)", Package="1608 Murata", Check_prices=https://www.snapeda.com/parts/NCU18WF104D60RB/Murata/view-part/1297311/?ref=eda, Digi-Key_Part_Number=490-18157-1-ND, MF=Murata, MP=NCU18WF104D60RB, Purchase-URL=https://pricing.snapeda.com/search/part/NCU18WF104D60RB/?ref=eda, SnapEDA_Link=https://www.snapeda.com/parts/NCU18WF104D60RB/Murata/view-part/1297311/?ref=snap
U1: "Undefined or Miscellaneous", Manufacturer_Name="Keystone Electronics", Mouser Part Number=534-1042P, Arrow Part Number=1042P, Arrow Price/Stock=https://www.arrow.com/en/products/1042p/keystone-electronics?region=europe, Datasheet Link=http://www.keyelco.com/product-pdf.cfm?p=13957, Height=14mm, Manufacturer_Part_Number=1042P, Mouser Price/Stock=https://www.mouser.co.uk/ProductDetail/Keystone-Electronics/1042P?qs=g2rIOKKlpoboHyq0g1zn1A%3D%3D
Y1: "Integrated Circuit", Manufacturer_Name=ABRACON, Mouser Part Number=815-ABS07-32.768K9T, Arrow Part Number=ABS07-32.768KHZ-9-T, Arrow Price/Stock=https://www.arrow.com/en/products/abs07-32.768khz-9-t/abracon?region=europe, Datasheet Link=http://www.abracon.com/Resonators/ABS07.pdf, Manufacturer_Part_Number=ABS07-32.768KHZ-9-T, Mouser Price/Stock=https://www.mouser.co.uk/ProductDetail/ABRACON/ABS07-32.768KHZ-9-T?qs=2nyfZ6BV3ogTQgR0mYqaug%3D%3D
Y2: "Crystal or Oscillator", Manufacturer_Name=ECS, Datasheet Link=https://ecsxtal.com/store/pdf/ECX-2236B.pdf, Height=0.6mm, Manufacturer_Part_Number=ECS-400-8-36B-7KY-TR

## Via types
v1: diameter 0.4, hole 0.2, Top Layer to GND, 133 vias
v2: diameter 0.6, hole 0.3, Top Layer to GND, 53 vias
v3: diameter 0.4, hole 0.2, Top Layer to GND, tented bottom, 43 vias
v4: diameter 0.6, hole 0.3, Top Layer to GND, tented bottom, 38 vias
v5: diameter 1.27, hole 0.711, Top Layer to GND, 5 vias
v6: diameter 1, hole 0.2, Top Layer to GND, 4 vias
v7: diameter 6, hole 3, Top Layer to GND, 4 vias
v8: diameter 1, hole 0.3, Top Layer to GND, 2 vias
v9: diameter 1, hole 0.2, Top Layer to GND, tented bottom, 1 vias

## Nets (pads, with @x,y where several pads share a name; then routed paths per layer and width w, separated by ;. In a path a pad name is that pad's centre, name@x,y a point inside that pad or via, vN(x,y) a via of type N, cw(c..) or ccw(c..) an arc to the next point about the centre after c; other vN are vias at no path point)
1.8V: C1.1 C9.1 C11.1 C12.1 C14.1 C15.1 C19.1 C22.1 C23.1 C26.1 IC2.3 IC2.7 IC2.8 IC3.10 IC3.25 IC3.33 IC3.36 IC3.37 IC3.39 IC3.44 IC3.47 IC3.48 IC3.54 J5.1 L2.1 R3.2 R7.1 R8.1 R9.1 R13.1 R14.1 | length 19.4
  Top Layer w0.2: v3(82.9,54.3) ccw(c83.263,54.3) 83.263,53.937 IC3.54 ; C14.1 83.26,58.569 ccw(c84.154,58.569) 83.522,57.937 84.18,57.279 ccw(c84.522,57.62) IC3.48 ; v1(84.23,59.24) ccw(c86.089,59.24) 84.774,57.926 85,57.7 85,57.19 ccw(c85.074,57.19) IC3.47 ; IC3.44 ccw(c86.478,57.181) 86.54,57.181 C23.1 87.377,58.58 ccw(c87.377,59.263) C12.1 88.503,58.78 cw(c88.503,58.063) C1.1 ; IC3.10 89.022,47.689 ccw(c89.289,47.689) 89.1,47.5 cw(c88.859,47.259) 89.2,47.259 89.141,47.2 v1(89.1,47.2) ; IC3.39 89.022,58.542 ccw(c88.982,58.542) C1.1 ; IC3.37 ccw(c89.93,57.23) 90.06,57.23 C22.1 ; IC3.36 90.522,57.425 ccw(c88.945,57.425) C22.1 ; IC3.33 ccw(c91.567,57.592) 92.21,57.592 C11.1 ; IC3.25 93.308,52.937 ccw(c93.308,53.492) C19.1 ; C1.1 ccw(c89.082,58.642) 89.082,58.54 C22.1
  other v1: 85.8,41.1 85.9,42.4 92.7,43.7 91.4,46.2 108.2,47.4 89.8,58.3 87.9,58.4 88.8,58.4 91.8,58.6 82.8,59.2 94.5,59.6 85.5,62.3 85.5,64.1 85.5,65.9
  other v2: 64.2,62.8 65.6,62.8 67,62.8 68.4,62.8 69.9,62.8 64.2,63.9 65.6,63.9 67,63.9 68.4,63.9 69.9,63.9 64.2,65.1 65.6,65.1 67,65.1 64.2,66.3 65.6,66.3 67,66.3
  other v6: 64.1,70.9
ANA-IN: C25.1 IC3.59 R16.2 R17.1 | length 4.5
  Top Layer w0.2: R16.2 ccw(c79.546,51.321) 79.546,51.15 R17.1 cw(c81.141,50.909) 81.141,51.25 C25.1 cw(c82.952,50.798) 82.952,51.437 IC3.59
BATT: C2.1 C24.1 IC1.17 U1.5 | length 2.4
  Top Layer w0.3: IC1.17 59.12,63.92 cw(c59.7,63.92) v1(59.7,64.5)
  other v5: 26.9,49.9 32,52.1 27,54.1 34,67.4 49.1,67.4
  other v6: 31.9,49.6
CS: IC2.1 IC3.14 R13.2 | length 10.1
  Top Layer w0.1: R13.2 91.242,47.028 ccw(c93,48.787) 93,46.3 93.5,46.3 cw(c93.5,46) 93.8,46 93.8,42.855 cw(c92.08,42.855) IC2.1
  Top Layer w0.2: IC3.14 cw(c90.978,48.193) 91.04,48.193 R13.2
DIG: C13.1 C17.1 C18.1 IC3.9 IC3.56 L4.2 | length 15
  Top Layer w0.2: C13.1 ccw(c83.803,54.653) 83.803,52.937 ccw(c83.803,51.451) C17.1@82.752,52.502 ; 88.49,47.23 ccw(c88.413,47.307) 88.522,47.307 IC3.9
  Top Layer w0.3: L4.2 76.07,53.83 ccw(c76.9,53.83) 76.9,53 v3(77,53)
  Top Layer w0.4: v1(86.8,47.2) C18.1
  Int2 (PWR) w0.3: v3(77,53) 79,53 ccw(c79,53.7) 79.7,53.7 cw(c80.1,53.7) 80.1,54.1 82,54.1 cw(c82,53.5) 82.6,53.5 v3(82.6,52.6)
GND: ANT1.1 ANT1.2 C1.2 C2.2 C3.2 C4.2 C5.2 C6.2 C7.2 C8.2 C9.2 C10.2 C11.2 C12.2 C13.2 C14.2 C15.2 C16.2 C17.2 C18.2 C19.2 C20.2 C21.2 C22.2 C23.2 C24.2 C25.2 FL1.2 FL1.4 IC1.2 IC1.4 IC1.5 IC1.19 IC1.21 IC2.4 IC2.9 IC3.65 J1.A1 J1.A12 J1.B1 J1.B12 J1.MH1 J1.MH2 J1.MH3 J1.MH4 J3.3 J3.4 J4.1 J4.3 J4.4 J5.3 J5.5 J5.9 LED2.1 LED3.1 LED4.1 R1.1 R2.2 R5.2 R10.2 R11.2 R12.2 R15.1 R17.2 RT1.1 U1.4 Y2.2 Y2.4 | length 24.4
  Top Layer w0.254: v2(54.81,61.55) 54.818,61.558 55.792,61.558 R2.2 55.8,61.523 55.973,61.35 IC1.2 ; IC1.5 56.294,60.15 56.174,60.03 v2(56.08,60.03) 56.11,60.06 56.11,60.39 56.27,60.55 IC1.4 ; v1(58.1,63.6) 58.133,63.6 58.182,63.552 cw(c58.066,63.325) 58.32,63.325 IC1.19 ; v4(60.6,56.13) 60.615,56.145 60.615,57.121 C10.2 ; v4(64.25,57.43) 64.287,57.43 64.9,58.044 R5.2
  Top Layer w0.3: J1.B12 23.9,53.3 ccw(c24.322,53.722) 24.322,53.125 J1.A12 ; J1.B1 23.178,58.875 cw(c23.178,58.278) 23.6,58.7 24.644,58.7 cw(c24.644,58.444) J1.A1
  Top Layer w0.5: J4.1 118.586,55.93 cw(c118.586,55.486) ANT1.1
  Top Layer w1: ANT1.1 118.9,61.7
  other v1: 72.38,42.39 92.7,45 72.25,45.16 87.9,46.4 105.6,47.4 106.9,47.4 113.6,48 115.2,48 116.8,48 118.4,48 112.8,49.6 114.4,49.6 116,49.6 117.6,49.6 119.2,49.6 113.6,51.2 115.2,51.2 116.8,51.2 118.4,51.2 104,54.4 109.1,54.6 106.4,54.7 107.9,54.7 105,54.8 110.8,54.9 112,54.9 97.6,57.6 99.2,57.6 100.8,57.6 102.4,57.6 104,57.6 105.6,57.6 107.2,57.6 108.8,57.6 110.4,57.6 112,57.6 80.76,57.696 82.46,57.696 96.8,59.2 98.4,59.2 100,59.2 101.6,59.2 103.2,59.2 104.8,59.2 106.4,59.2 108,59.2 109.6,59.2 111.2,59.2 90.07,59.66 86.55,59.69 89.02,59.71 93.61,60.01 87.86,60.046 92.22,60.04 83.2,60.4 84.2,60.4 96,60.8 97.6,60.8 99.2,60.8 100.8,60.8 102.4,60.8 104,60.8 105.6,60.8 107.2,60.8 108.8,60.8 110.4,60.8 112,60.8 81.7,62.2 103.2,62.4 104.8,62.4 106.4,62.4 108,62.4 109.6,62.4 111.2,62.4 112.8,62.4 114.4,62.4 116,62.4 117.6,62.4 119.2,62.4 102.4,64 104,64 105.6,64 107.2,64 108.8,64 110.4,64 112,64 113.6,64 115.2,64 116.8,64 118.4,64 81.7,64.1 103.2,65.6 104.8,65.6 106.4,65.6 108,65.6 109.6,65.6 111.2,65.6 112.8,65.6 119.2,65.6 81.8,65.9
  other v2: 87.9,41.2 89.3,41.2 90.7,41.2 88.6,41.7 90,41.7 87.9,42.3 89.3,42.3 90.7,42.3 88.6,42.9 90,42.9 87.9,43.5 89.3,43.5 90.7,43.5 88.6,44.1 90,44.1 87.9,44.7 89.3,44.7 90.7,44.7 105.8,49.8 108.4,49.8 111,49.8 107.1,50.9 109.7,50.9 105.8,52 108.36,52 111,52 25,52.9 68.81,58.69 69.86,58.71 25,58.9 58.13,60.38 59.29,60.37 58.72,60.95 58.16,61.51 59.29,61.52
  other v3: 103,47.5 72.28,48.04 99.396,48.6 80.9,49.2 82.4,50 54.7,51 95.172,51.031 100.8,51.2 102.4,51.2 104,51.2 97.294,51.314 81.23,52.29 100,52.8 101.6,52.8 103.2,52.8 98.3,52.9 81.77,53.04 80.34,53.14 94.4,54.027 93.7,54.1 97.6,54.4 100.8,54.4 96,54.8 98.4,54.9 99.6,54.9 102,54.9 103.2,54.9 98.4,57 99.6,57 102,57 103.2,57 110.8,57 112,57 94.6,57.1 95.8,57.1 97,57.1
  other v4: 85.5,50.3 86.6,50.3 87.8,50.3 89,50.3 90.2,50.3 91.3,50.3 85.5,51.3 86.6,51.3 87.8,51.3 89,51.3 90.2,51.3 91.3,51.3 85.5,52.4 86.6,52.4 87.8,52.4 89,52.4 90.2,52.4 91.3,52.4 85.5,53.4 86.6,53.4 87.8,53.4 89,53.4 90.2,53.4 91.3,53.4 85.5,54.4 86.6,54.4 87.8,54.4 89,54.4 90.2,54.4 91.3,54.4 85.5,55.5 86.6,55.5 87.8,55.5 89,55.5 90.2,55.5 91.3,55.5
  other v6: 62.2,70.9
  other v8: 34,59 49,59
  other v9: 35,49.5
LED1: IC3.2 R18.1 | length 9.1
  Top Layer w0.2: R18.1 80.51,48.1 cw(c80.51,45.71) 82.2,47.4 84.759,47.4 ccw(c84.759,47.741) 85,47.5 85,48.185 cw(c85.074,48.185) IC3.2
LED2: IC3.3 R19.1 | length 10.2
  Top Layer w0.2: R19.1 78.112,46.432 cw(c79.241,45.303) 79.241,46.9 85,46.9 85.1,47 ccw(c84.082,48.018) 85.522,48.018 IC3.3
LED3: IC3.4 R20.1 | length 12.3
  Top Layer w0.2: R20.1 80.363,46.043 cw(c80.5,45.907) 80.5,46.1 cw(c81.224,45.376) 81.224,46.4 85.4,46.4 ccw(c83.899,47.901) 86.022,47.901 IC3.4
NetC3_1: C3.1 IC3.51 Y1.2 | length 5.4
  Top Layer w0.2: Y1.2 cw(c79.217,56.499) 79.217,56.922 C3.1 81.528,56.181 ccw(c83.324,57.977) 83.324,55.437 IC3.51
NetC4_1: C4.1 IC3.52 Y1.1 | length 5.1
  Top Layer w0.2: Y1.1 ccw(c79.203,54.583) 79.203,54.18 C4.1 80.833,54.193 cw(c82.63,52.397) 82.63,54.937 IC3.52
NetC5_1: C5.1 IC3.22 Y2.1 | length 4.5
  Top Layer w0.1: IC3.22 93.427,51.437 cw(c93.427,50.627) 94,51.2 94.829,50.371 cw(c94.659,50.2) 94.9,50.2 ccw(c95.112,50.412) 95.112,50.112 Y2.1
  Top Layer w0.2: Y2.1 96.519,49.684
NetC6_1: C6.1 IC3.23 Y2.3 | length 5.3
  Top Layer w0.1: IC3.23 95.05,52.022 cw(c95.069,51.519) 95.148,52.016 95.645,51.939 ccw(c95.66,52.037) 95.66,51.937 ccw(c95.66,52.948) Y2.3 97.466,53.325 C6.1
NetC7_1: C7.1 J3.1 L1.1 | length 2.5
  Top Layer w0.4: J3.1 105.047,55.887 ccw(c105.047,55.91) C7.1 105.07,55.92 L1.1
NetC8_1: C8.1 J4.2 L1.2 R1.2 | length 4.1
  Top Layer w0.4: L1.2 107.89,55.92 C8.1 ccw(c107.91,55.91) 107.91,55.89 R1.2 cw(c109.14,55.89) 109.14,55.93 J4.2
NetC16_1: C16.1 IC3.49 | length 1.5
  Top Layer w0.2: C16.1 82.657,56.92 cw(c82.657,55.272) IC3.49
NetC21_1: C21.1 IC3.24 | length 2.1
  Top Layer w0.2: IC3.24 93.908,52.437 ccw(c93.908,52.992) 94.3,52.6 94.3,52.859 cw(c94.641,52.859) C21.1
NetC26_2: C26.2 IC1.8 R3.1 R5.1 | length 12.1
  Top Layer w0.254: IC1.8 58.72,58.743 ccw(c58.974,58.743) v1(58.901,58.5) ; v1(62.6,58.6) cw(c62.9,58.6) 62.9,58.9 65.2,58.9 cw(c65.2,58.176) 65.924,58.176 R5.1
  Top Layer w0.3: R5.1 ccw(c65.924,58.282) 66.15,58.282 R3.1 cw(c66.32,59.786) 66.32,59.956 C26.2
  Int2 (PWR) w0.254: v1(58.901,58.5) 62.5,58.5 ccw(c62.5,58.6) v1(62.6,58.6)
NetFL1_1: FL1.1 IC3.31 | length 6
  Top Layer w0.152: IC3.31 92.731,55.929 93.9,55.929
  Top Layer w0.457: 93.9,55.929 98.635,55.929 FL1.1
NetFL1_3: FL1.3 J3.2 | length 2.4
  Top Layer w0.4: FL1.3 101.611,55.967 cw(c101.611,55.887) J3.2
NetIC1_6: IC1.6 IC3.1 | length 33.1
  Top Layer w0.1: v3(57.7,56.5) 57.7,56.4 58.756,55.344 ccw(c60.552,57.14) 60.552,54.6 71.248,54.6 cw(c71.248,52.06) 73.044,53.856 77.8,49.1 ccw(c79.007,50.307) 79.007,48.6 81.3,48.6 cw(c81.3,48.4) 81.5,48.4 ccw(c81.663,48.4) 81.663,48.237 IC3.1 ; v1(57.7,58.5) 57.7,58.919 cw(c58.451,58.919) IC1.6
  Int2 (PWR) w0.1: v3(57.7,56.5) v1(57.7,58.5)
NetIC1_14: IC1.14 LED1.1 | length 20
  Top Layer w0.1: LED1.1 v3(49.4,55.1) ; IC1.14 cw(c60.341,61.229) 60.341,61.4 v1(61.1,61.4)
  Int2 (PWR) w0.1: v3(49.4,55.1) 52.656,58.356 cw(c54.452,56.56) 54.452,59.1 59.6,59.1 ccw(c57.91,60.79) 60.3,60.79 60.776,61.266 cw(c61.1,60.941) v1(61.1,61.4)
NetIC1_15: IC1.15 R4.2 RT1.2
NetIC1_16: IC1.16 R2.1 | length 5
  Top Layer w0.1: IC1.16 59.879,62.45 cw(c59.879,62.279) v1(60,62.4)
  Int2 (PWR) w0.1: v1(56,62.7) 56.064,62.636 ccw(c57.6,64.173) 57.6,62 ccw(c57.6,62.1) 57.623,62.003 58.019,62.097 cw(c58.16,61.51) 58.156,62.114 59.283,62.124 cw(c59.29,61.52) 59.631,62.019 59.659,62 ccw(c59.659,62.341) 59.9,62.1 ccw(c59.659,62.341) 60,62.341 v1(60,62.4)
NetIC3_43: IC3.43 L4.1 | length 12.7
  Top Layer w0.3: L4.1 cw(c77.13,57.24) 77.13,58.3 v1(77.5,58.3) ; IC3.43 87.022,57.895 87.1,57.973 v1(87.1,58)
  Int2 (PWR) w0.3: v1(77.5,58.3) 86.8,58.3 cw(c86.8,58) v1(87.1,58)
NetIC3_45: IC3.45 L3.2 | length 7.5
  Top Layer w0.2: IC3.45 86.022,57.606 ccw(c85.606,57.606) 85.9,57.9 cw(c86.383,58.383) 85.7,58.383 85.7,58.9 cw(c87.631,58.9) 86.266,60.266 86.4,60.4 cw(c86.883,59.917) 86.883,60.6 88.5,60.6 89.169,61.269 ccw(c88.418,62.02) L3.2
NetIC3_46: IC3.46 L3.1 | length 5.9
  Top Layer w0.2: IC3.46 85.522,57.24 ccw(c83.74,57.24) 85,58.5 85,58.688 cw(c87.54,58.688) 85.744,60.484 L3.1
NetLED1_2: LED1.2 R6.2 | length 13.6
  Top Layer w0.1: LED1.2 52.602,54 ccw(c52.602,56.54) 54.398,54.744 R6.2
NetLED2_2: LED2.2 R18.2 | length 1.8
  Top Layer w0.2: LED2.2 cw(c73.982,47.998) 73.982,48.1 R18.2
NetLED3_2: LED3.2 R19.2 | length 1.9
  Top Layer w0.2: LED3.2 ccw(c73.908,45.268) 73.908,45.2 R19.2
NetLED4_2: LED4.2 R20.2 | length 1.6
  Top Layer w0.2: LED4.2 ccw(c74.062,42.502) 74.062,42.4 R20.2
NetR16_1: R16.1
NRST: C20.1 IC3.32 J5.10 R14.2 | length 34.9
  Top Layer w0.2: v3(93.4,56.7) 93.2,56.7 ccw(c93.2,56.179) 92.832,56.548 IC3.32 92.722,56.71 cw(c95.262,56.71) 93.466,58.506 93.538,58.578 ccw(c93.659,58.699) 93.659,58.527 R14.2
  Int2 (PWR) w0.2: v3(93.4,56.7) 95.105,54.995 cw(c94.713,54.603) 95.187,54.891 95.437,54.481 ccw(c95.91,54.77) 95.529,54.367 99.252,50.848 ; 99.253,50.848 99.29,50.811 99.76,50.341 101.701,48.4 108.965,48.4 cw(c106.694,46.127) 109.907,46.126 cw(c107.685,46.127) 109.256,44.556 108.7,44 cw(c108.217,44.483) 108.217,43.8 105.152,43.8 ccw(c105.152,41.26) 103.356,43.056 103,42.7 v1(103,42.5)
SCK: IC2.6 IC3.11 | length 8.4
  Top Layer w0.1: IC2.6 cw(c86.48,44.555) 85.6,44.555 85.6,45.6 85.658,45.658 cw(c85.728,45.587) 85.69,45.679 85.962,45.792 cw(c86,45.7) 86,45.8 88.659,45.8 ccw(c88.659,46.141) 88.9,45.9 ccw(c88.829,45.971) 88.911,45.913 89.612,46.91 ccw(c89.2,47.2) 89.696,47.292 IC3.11
SI: IC2.5 IC3.12 | length 5.9
  Top Layer w0.1: IC2.5 cw(c87.035,44.945) 87.035,45.5 88.4,45.5 ccw(c88.4,47.1) 90,47.1 90,48.216 cw(c90.022,48.216) IC3.12
SO: IC2.2 IC3.13 | length 9.3
  Top Layer w0.1: IC3.13 90.522,45.778 ccw(c90.7,45.778) 90.7,45.6 93,45.6 cw(c93,45.1) 93.5,45.1 93.5,43.825 cw(c92.08,43.825) IC2.2
SOP0: IC3.35 R9.2 R12.1 | length 14.5
  Top Layer w0.1: R12.1 R9.2 cw(c85.083,62.26) 84.422,62.922 84.5,63 85.859,63 ccw(c85.859,63.341) 86.1,63.1 cw(c87.307,61.893) 87.307,63.6 89.634,63.6 cw(c89.634,62.234) 90.6,63.2 cw(c89.582,62.182) 91.022,62.182 IC3.35
  other v1: 84,62.2
SOP1: IC3.34 R8.2 R11.1 | length 15.1
  Top Layer w0.1: R11.1 v1(84,64.1) 84.1,64.1 cw(c84.1,64.032) R8.2 84.198,64.199 84.205,64.218 cw(c85.61,62.813) 85.61,64.8 88.548,64.8 cw(c88.548,62.26) 90.344,64.056 90.778,63.622 cw(c88.982,61.826) 91.522,61.826 cw(c91.422,61.826) 91.522,61.819 91.297,58.635 ccw(c91.8,58.6) 91.302,58.521 IC3.34
SOP2: IC3.21 R7.2 R10.1 | length 28.8
  Top Layer w0.1: R10.1 83.026,65.89 R7.2 ; IC3.21 93.001,50.937 cw(c93.001,50.001) v3(93.663,50.663)
  Int2 (PWR) w0.1: v1(84.1,65.9) cw(c84.341,65.9) 84.171,66.071 84.9,66.8 87.848,66.8 cw(c87.848,64.26) 89.644,66.056 94.856,60.844 cw(c93.06,59.048) 95.6,59.048 95.6,58.9 cw(c94.393,58.9) 95.247,58.047 95.2,58 93.983,58 ccw(c93.983,57.317) 93.5,57.8 93.124,57.424 ccw(c94.149,56.4) 92.7,56.4 93.955,55.145 cw(c93.884,55.075) 93.972,55.121 94.15,54.788 cw(c93.707,54.549) 94.21,54.576 ccw(c94.713,54.603) 94.298,54.318 94.4,52.448 cw(c94.3,52.442) 94.4,52.442 cw(c91.885,52.442) v3(93.663,50.663)
SW: IC1.13 L2.2 | length 2.2
  Top Layer w0.2: IC1.13 61.032,60.85 ccw(c61.1,61.4) 61.195,60.854 61.727,60.947 cw(c61.762,60.75) 61.762,60.95 cw(c61.762,60.117) L2.2
TCK: IC3.19 J5.4 R15.2 | length 18.6
  Top Layer w0.1: IC3.19 92.827,49.937 cw(c92.827,49.127) 93.4,49.7 93.4,49.483 ccw(c94.083,49.483) 93.6,49 ccw(c94.566,49.966) 94.566,48.6 R15.2 98.087,48.202 ccw(c99.029,48.202) 98.363,47.537 101.5,44.4 ccw(c102.466,45.366) 102.466,44 105.959,44 cw(c105.959,43.659) 106.2,43.9 cw(c104.727,42.427) 106.81,42.427 J5.4
TDI: IC3.16 J5.8 | length 15.6
  Top Layer w0.1: IC3.16 92.022,47.778 ccw(c92.8,47.778) 92.8,47 97.351,47 cw(c97.351,44.951) 98.8,46.4 100.856,44.344 ccw(c102.652,46.14) 102.652,43.6 103.459,43.6 cw(c103.459,43.259) 103.7,43.5 103.876,43.324 ; 103.876,43.324 cw(c102.851,42.3) 104.3,42.3 ccw(c104.372,42.228) 104.27,42.228 J5.8
TDO: IC3.17 J5.6 | length 16.1
  Top Layer w0.1: IC3.17 93.177,48.482 ccw(c94.1,49.406) 94.1,48.1 96.834,48.1 cw(c96.834,46.734) 97.8,47.7 101.064,44.436 ccw(c102.6,45.973) 102.6,43.8 104.4,43.8 cw(c104.4,42.66) 105.54,42.66 J5.6
TMS: IC3.20 J5.2 | length 20.8
  Top Layer w0.1: IC3.20 93.155,50.437 cw(c93.155,50.337) 93.239,50.391 ccw(c93.663,50.663) 93.355,50.265 93.848,49.771 ccw(c94.157,50.079) 94.157,49.643 ccw(c95.952,51.44) 95.952,48.9 97.259,48.9 ccw(c97.259,49.241) 97.5,49 cw(c97.983,48.517) 97.983,49.2 99.559,49.2 cw(c99.559,48.859) 99.8,49.1 cw(c99.559,48.859) 99.9,48.859 99.9,47.3 ccw(c101.831,47.3) 100.466,45.934 101.8,44.6 ccw(c102.524,45.324) 102.524,44.3 106.334,44.3 cw(c106.334,42.934) 107.3,43.9 107.336,43.864 cw(c105.54,42.068) 108.08,42.068 J5.2
USBV+: IC1.1 IC1.20 J1.A4 J1.A9 J1.B4 J1.B9 R4.1 | length 6.5
  Top Layer w0.3: J1.B9 23.378,54.875 cw(c23.378,54.278) 23.8,54.7 ccw(c23.981,54.881) 23.981,54.625 J1.A9 25.478,54.625 ccw(c25.478,55.222) 25.9,54.8 ; J1.B4 23.378,57.375 cw(c23.378,56.778) 23.8,57.2 23.9,57.1 24.765,57.1 ccw(c24.765,57.185) J1.A4 26.14,57.125 cw(c26.14,57.04) 26.2,57.1
  other v6: 59.1,70.9
Vout: C10.1 IC1.7 IC1.11 IC1.12 IC1.18 R6.1 | length 17
  Top Layer w0.254: R6.1 IC1.7 ; R6.1 59.566,57.566 ccw(c59.566,57.78) 59.78,57.78 cw(c60.056,57.78) 60.056,58.056 C10.1 60.63,59.74 ; IC1.18 58.72,63.841 ; IC1.11@60.22,60.13 cw(c60.22,59.72) 60.63,59.72 ; IC1.12 60.69,60.55 60.909,60.331 cw(c60.739,60.16) v1(60.98,60.16) 60.244,60.16 ccw(c60.244,60.126) IC1.11 IC1.11@60.61,60.15
  Int2 (PWR) w0.254: v1(58.2,64.3) 58.4,64.3 58.7,64 59.3,63.4 60.511,63.4 60.585,63.326 cw(c60.406,63.146) 60.586,63.325 60.69,63.111 ccw(c61.279,63.397) 61.041,62.787 61.043,62.786 cw(c60.624,61.714) 61.585,61.08 v1(60.98,60.16)
pads on no net: IC1.3 IC1.9 IC1.10 IC3.5 IC3.6 IC3.7 IC3.8 IC3.15 IC3.18 IC3.26 IC3.27 IC3.28 IC3.29 IC3.30 IC3.38 IC3.40 IC3.41 IC3.42 IC3.50 IC3.53 IC3.55 IC3.57 IC3.58 IC3.60 IC3.61 IC3.62 IC3.63 IC3.64 J1.A2 J1.A3 J1.A5 J1.A6 J1.A7 J1.A8 J1.A10 J1.A11 J1.B2 J1.B3 J1.B5 J1.B6 J1.B7 J1.B8 J1.B10 J1.B11 J1.MH5 J1.MH6 J5.7 U1.1 U1.2 U1.3
copper on no net:
  other v7: 20,44 116,44 20,68 116,68

## Polygon pours and split planes (outlines as drawn)
GND on Top Layer "NONET_L01_P-001" (solid, pour order 9): 112.4,52.7 120,52.7 120,40 cw(c119.3,40) 119.3,39.3 16.4,39.3 cw(c16.4,39.7) 16,39.7 16,50.6 cw(c16.9,50.6) 16.9,51.5 21.3,51.5 ccw(c21.3,52.2) 22,52.2 22,59.7 ccw(c21.2,59.7) 21.2,60.5 16.6,60.5 cw(c16.6,61.1) 16,61.1 16,72 119.6,72 cw(c119.6,71.6) 120,71.6 120,61.5 cw(c119.6,61.5) 119.6,61.1 112.8,61.1 ccw(c112.8,60.7) 112.4,60.7
USBV+ on Top Layer "NONET_L01_P-001" (solid, pour order 4): 24.1,57.4 24.1,54.4 32.348,54.4 ccw(c32.348,56.94) 34.144,55.144 41.956,62.956 cw(c43.752,61.16) 43.752,63.7 55.7,63.7 cw(c55.7,62.493) 56.554,63.346 56.6,63.3 cw(c56.359,63.059) 56.7,63.059 56.7,61.841 ccw(c57.041,61.841) 56.8,61.6 57.6,61.6 cw(c57.841,61.6) 57.671,61.771 57.9,62 ccw(c57.9,62.241) 58.071,62.071 58.1,62.1 58.1,62.476 ccw(c57.076,62.476) 57.8,63.2 cw(c58.283,63.683) 57.6,63.683 57.6,64.5 cw(c58.083,64.5) 57.741,64.841 57.8,64.9 cw(c58.041,64.659) 58.041,65 61.1,65 ccw(c60.617,65.483) 61.3,65.483 61.3,70.093 ccw(c59.593,70.093) 60.8,71.3 ccw(c60.317,70.817) 60.317,71.5 28.452,71.5 ccw(c28.452,68.96) 26.656,70.756 26.2,70.3 ccw(c27.166,69.334) 25.8,69.334 25.8,57.883 cw(c25.117,57.883) 25.6,57.4
1.8V on Top Layer "NONET_L01_P-001" (solid, pour order 0): 63.55,59.71 64.44,59.71 64.44,60.26 cw(c64.71,60.26) 64.71,60.53 68.35,60.53 cw(c68.35,60.42) 68.46,60.42 ccw(c68.54,60.42) 68.54,60.34 70.64,60.34 ccw(c70.64,60.84) 71.14,60.84 71.14,66.06 ccw(c70.19,66.06) 70.19,67.01 63.91,67.01 ccw(c63.91,66.66) 63.56,66.66
no net on Top Layer "NONET_L01_P-001" (solid, pour order 1): 92.7,66.5
BATT on Int2 (PWR) "NONET_L01_P-001" (solid, pour order 5): 51.1,63.46 cw(c51.197,63.363) 51.197,63.5 60.693,63.5 ccw(c60.693,65.207) 61.9,64 ccw(c60.693,65.207) 62.4,65.207 62.4,70.4 ccw(c61,70.4) 61,71.8 60.3,71.8 51.3,71.76 28.561,71.76 ccw(c28.561,69.22) 26.021,69.22 26.021,68.16 25.921,55.96 25.921,49.26 ccw(c26.821,49.26) 26.821,48.36 33.021,48.36 ccw(c33.021,49.26) 33.921,49.26 33.921,54.56 ccw(c32.521,54.56) 32.521,55.96 cw(c32.521,56.16) 32.321,56.16 32.321,62.26 cw(c33.521,62.26) 33.521,63.46
1.8V on Int2 (PWR) "NONET_L01_P-001" (solid, pour order 7): 109.26,50.7 97.019,50.7 cw(c97.019,53.24) 95.223,51.444 95.172,51.494 cw(c96.313,52.634) 94.7,52.634 94.7,60.248 ccw(c92.16,60.248) 93.956,62.044 85.644,70.356 ccw(c83.848,68.56) 83.848,71.1 63.6,71.1 63.6,41.5 ccw(c65.3,41.5) 65.3,39.8 109.7,39.8 ccw(c109.7,41.9) 111.8,41.9 111.8,48.16 ccw(c109.26,48.16)
GND on GND "NONET_L01_P-001" (solid, pour order 8): 120,52.7 112.4,52.7 112.4,60.7 cw(c112.8,60.7) 112.8,61.1 119.6,61.1 ccw(c119.6,61.5) 120,61.5 120,71.6 ccw(c119.6,71.6) 119.6,72 16,72 ccw(c16,71.976) 15.976,71.976 15.976,60.5 21.4,60.5 cw(c21.4,60) 21.9,60 21.9,52 cw(c21.5,52) 21.5,51.6 16.9,51.6 ccw(c16.9,50.7) 16,50.7 16,39.7 ccw(c16.4,39.7) 16.4,39.3 119.3,39.3 ccw(c119.3,40) 120,40